# Altium PCB PCB1.PcbDoc
Units mm, origin at the board's own origin, x right, y up, seen from the top; angles counter-clockwise.
Board outline 152.4 x 101.6 mm, 2 copper layers (Top Layer, Bottom Layer); 8 components, 8 nets, 29 pads, 0 vias.
Unrouted connection lines stored in the file: 16.
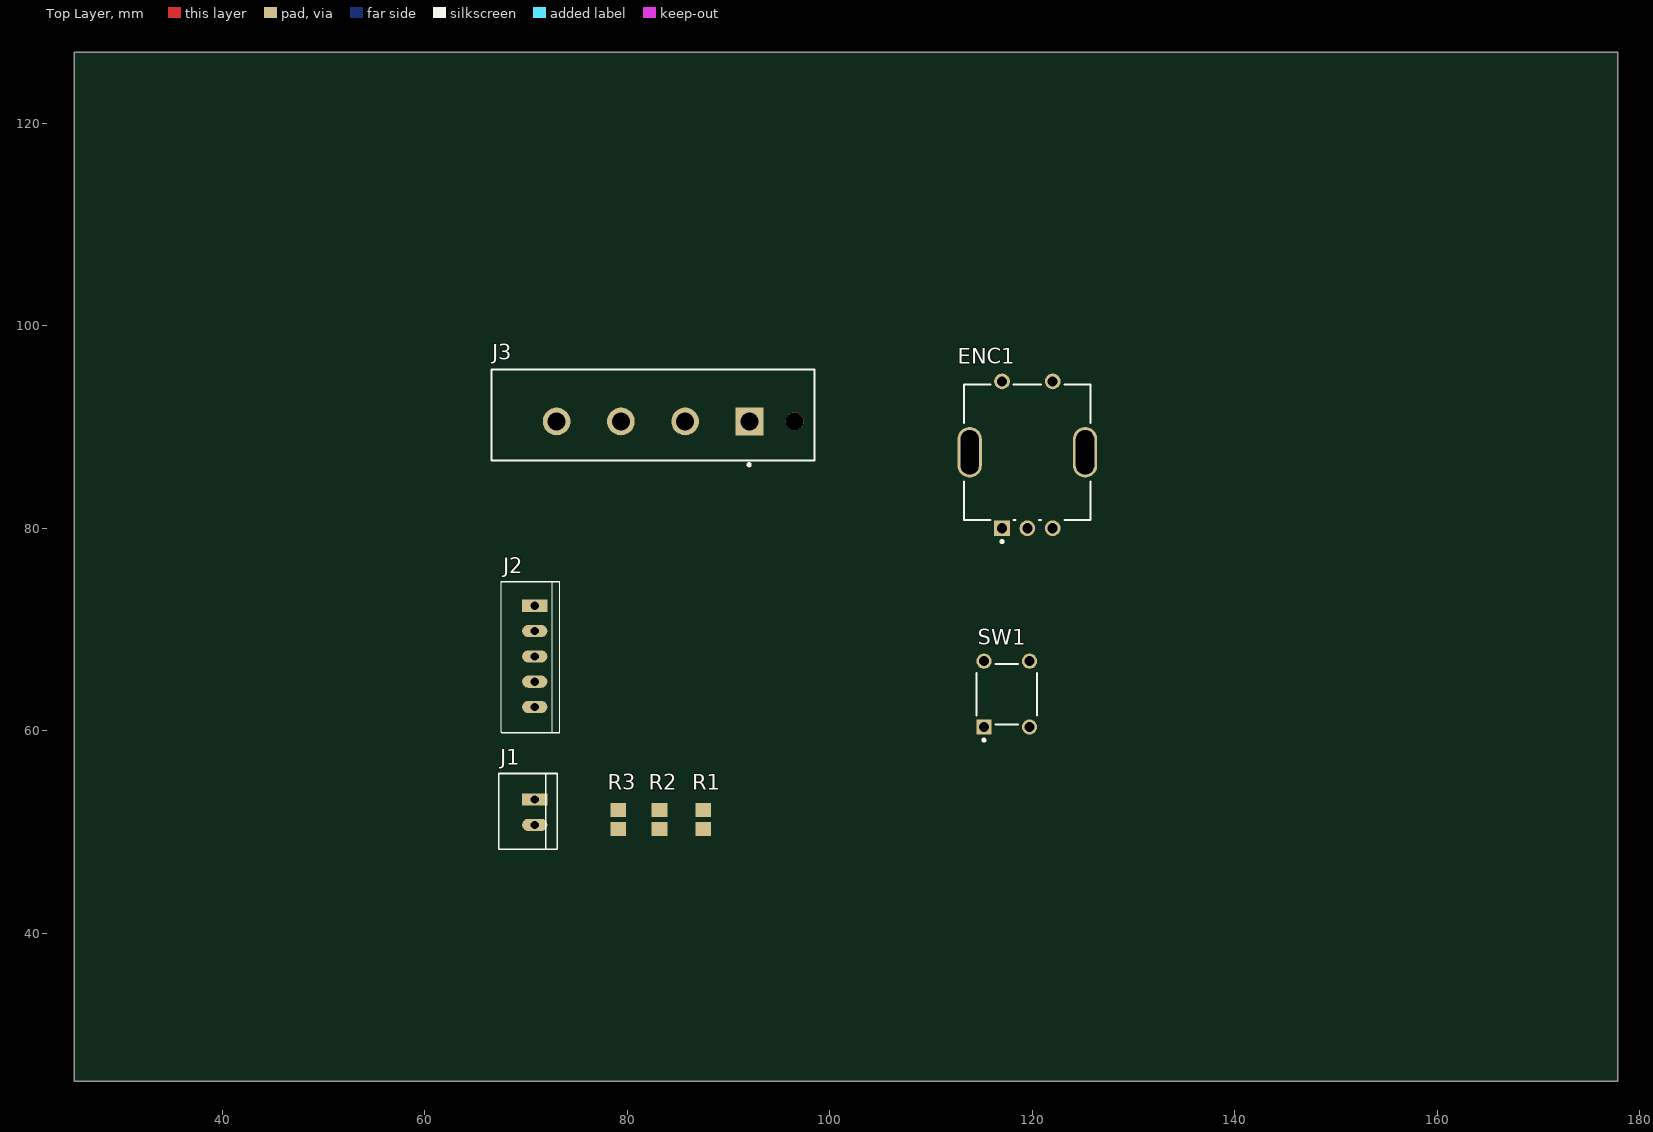
[diagram p0: Top Layer view]
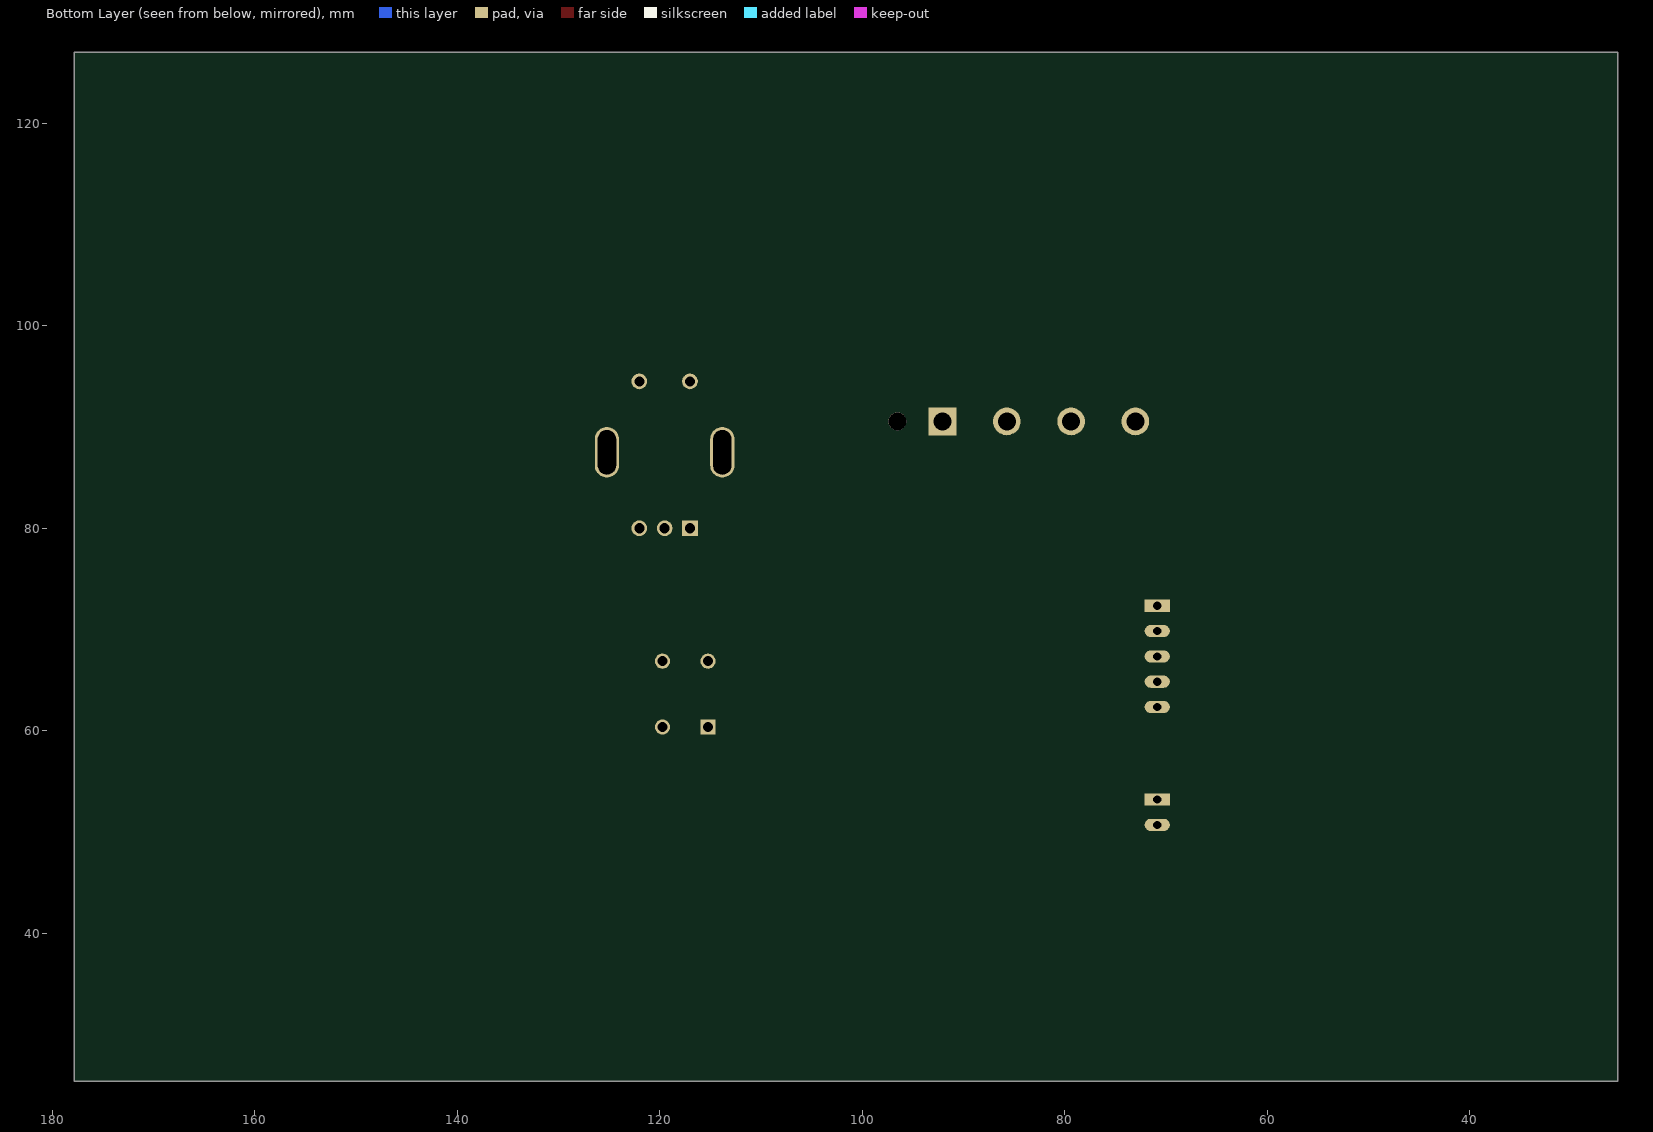
[diagram p1: Bottom Layer view, seen from below]

## Layer stack, top to bottom
Top Solder: solder mask 0.0102, Solder Resist, Dk 3.5
Top Layer: signal copper 0.0356
Dielectric 1: dielectric 0.32, FR-4, Dk 4.8
Bottom Layer: signal copper 0.0356
Bottom Solder: solder mask 0.0102, Solder Resist, Dk 3.5

## Board outline
25.4,25.4 177.8,25.4 177.8,127 25.4,127

## Design rules (kind name [scope] priority, off if disabled: settings)
Clearance [All] p1: gap=0.254 ignorepadtopadclearanceinfootprint=FALSE except(0: Arc-Hole Track-Hole SMDPad-Hole THPad-Hole Via-Hole Fill-Hole Poly-Hole Region-Hole Text-Hole)
PolygonConnect [All] p1: connectstyle=Relief reliefconductorwidth=0.254 reliefentries=4 polygonreliefangle="90 Angle" airgapwidth=0.254
RoutingVias [All] p1: holewidth=0.711 width=1.27 viastyle="Through Hole" minholewidth=0.711 minwidth=1.27 maxholewidth=0.711 maxwidth=1.27
SolderMaskExpansion [All] p1: expansion=0.102 istentingtop=FALSE
Width [All] p1: maxlimit=0.254 minlimit=0.254 preferedwidth=0.254
30 further rules are at their usual default settings.

## Components (designator, comment, footprint, x,y, rotation, side; value= is the part's Value field where it differs from the comment)
ENC1 "PEC11R-4215F-S0024" FP-PEC11R-4215F-S0024-MFG 119.507,87.503 r0 top
J1 "Power" JST_2P 70.866,53.213 r0 top
J2 "JST_5P" JST_5P 70.866,62.35 r0 top
J3 "OLED" FP-643416-1-MFG 82.55,91.186 r180 top
R1 "Res" RESC2013X60X40ML20T25 87.503,51.247 r90 top
R2 "Res" RESC2013X60X40ML20T25 83.185,51.247 r270 top
R3 "Res" RESC2013X60X40ML20T25 79.121,51.247 r270 top
SW1 "1825910-6" TECO-1825910-6_V 117.475,63.627 r90 top

## Footprints (in the part's own frame and the unit in brackets; to place one, negate y for a bottom-side part, rotate by r counter-clockwise, add the part's x,y. Pads: shape width x height; smd on the part's side, far side on the other; paste and mask are expansions set on the pad)
FP-643416-1-MFG [mm]
  rect 2.73x2.73 hole 1.78 paste-1000 mask+0: 1(-9.525,0.635)
  round 2.73 hole 1.78 paste-1000 mask+0: 2(-3.175,0.635) 3(3.175,0.635) 4(9.525,0.635)
  round 1.78 hole 1.78 unplated paste-1000 mask+0: ""(-13.975,0.635)
  silkscreen extent -15.94,-4.51 15.94,5.03, body extent -16.04,-4.61 16.04,4.61, height 0.25
FP-PEC11R-4215F-S0024-MFG [mm]
  round 1.55 hole 1 paste-1000 mask+0: 1(-2.5,7) 2(2.5,7) B(2.5,-7.5) C(0,-7.5)
  rrect100% 2.4x5 hole 4.4 slot 1.8 at 0 deg paste-1000 mask+0: 3(-5.7,0) 4(5.7,0)
  rect 1.55x1.55 hole 1 paste-1000 mask+0: A(-2.5,-7.5)
  silkscreen extent -6.25,-8.95 6.25,6.7, body extent -7,-8.37 7,7.88, height 0.25
JST_2P [mm]
  rect 2.5x1.2 hole 0.8: 1(0,0)
  oval 2.5x1.2 hole 0.8: 2(0,-2.5)
  silkscreen extent -3.57,-4.9 2.22,2.6, body extent -3.5,-4.9 2.25,2.5, height 7.01
JST_5P [mm]
  rect 2.5x1.2 hole 0.8: 1(0,10)
  oval 2.5x1.2 hole 0.8: 2(0,7.5) 3(0,5) 4(0,2.5) 5(0,0)
  silkscreen extent -3.3,-2.58 2.47,12.4, body extent -3.3,-2.47 2.45,12.43, height 6.91
RESC2013X60X40ML20T25 [mm] "Chip Resistor, 2-Leads, Body 2.00x1.25mm, IPC Low Density"
  rect 1.4x1.55 smd: 1(-0.95,0) 2(0.95,0)
  body extent -1.1,-0.72 1.1,0.72, height 0.6
TECO-1825910-6_V [mm] "Switch, 4-Leads, Body 5.99x5.99mm"
  rect 1.5x1.5 hole 0.99: 1(-3.25,2.25)
  round 1.5 hole 0.99: 2(3.25,2.25) 3(-3.25,-2.25) 4(3.25,-2.25)
  silkscreen extent -4.67,-3 3,3, body extent -3,-2.99 2.99,3, height 5

## Part data
ENC1: library part CMP-1747-00012-2, "ROTARY ENCODER MECHANICAL 24PPR", Max Operating Temperature=70°C, Min Operating Temperature=-30°C, Package Quantity=150, Built in Switch=Yes, Detent=Yes, Encoder Type=Mechanical, Height=13.4mm, Hole Diameter=1.8mm, Length=21.5mm, Mount="Through Hole", Number of Channels=2, Orientation=Vertical, Output Type=Quadrature, Packaging=Bulk, Pulses per Revolution=24, Radiation Hardening=No, REACH SVHC="No SVHC", RoHS Compliant=Yes, Series=PEC11R, Termination="PC Pins", Type=Mechanical, Width=12.5mm
J1: library part JST_2P
J3: library part CMP-03369-000025-1, "CONN HDR 4POS 0.25 TIN PCB", Current Rating=12A, Manufacturer=TE, Manufacturer Part Number=643416-1, Temperature="-40°C to +105°C", Temperature Range High=+105°C, Temperature Range Low=-40°C, Voltage Rating=600V, Automotive=No, Category=Conn, ComponentLink2Description=Datasheet, ComponentLink2URL=https://www.te.com/usa-en/product-643416-1.html?te_bu=Cor&te_type=other&te_campaign=oct_glo_cor-oct-global-oth-prtnr-fy19-oct-octo-buy-bom_sma-298_2&elqCampaignId=35216, Conn Gender=Female, Conn Orientation=Vertical, Contact Material=Tin, Device Class L1=Connectors, Device Class L2="Headers and Wire Housings", Device Class L3=unset, Digikey Description="CONN HDR 4POS 0.25 TIN PCB", Height=14.99mm, Is Female=yes, Lead Free=Yes, Mouser Description="Conn Power SKT 4 POS 6.35mm Solder ST Thru-Hole 4 Terminal 1 Port Bag", Number Of Contacts=4, Number Of Rows=1, Octopart=https://octopart.com/643416-1-te+connectivity-39538283, Package=643416-1, Pitch=6.35mm, RoHS=TRUE, Standoff Height=0.63mm
R1 R2 R3: library part CMP-2001-00629-1, Manufacturer=Panasonic, Part Number=ERA6AEB332V
SW1: library part CMP-1684-00021-1, "Tact Switch, SPST-NO, 0.05 A, -35 to 85 degC, 4-Pin THD, RoHS, Bulk", Actuator Color=Black, Contact Rating @ Voltage=0.05A@24VDC, Dielectric Strength=500VAC, Manufacturer="TE Connectivity", Maximum AC Voltage Rating=N/A, Maximum Contact Resistance=100mOhm, Maximum DC Voltage Rating=24V, Minimum Insulation Resistance=100MOhm, Operating Temperature=-35to85C, Package Description="4-Pin Through Hole Device, Body 5.99 x 5.99 mm, Pitch 6.5 mm", Package Reference=THD, Actuator Length=1.4mm, Actuator Material=PolybutyleneTerephthalate, Actuator Style=RoundButton, Base Material=N/A, Body Orientation=Straight, Bushing Type=Unthreaded, Contact Material=CopperAlloy, Contact Plating=Silver, Datasheet URL=http://www.te.com/commerce/DocumentDelivery/DDEController?Action=showdoc&DocId=Customer+Drawing%7F1825910%7FC9%7Fpdf%7FEnglish%7FENG_CD_1825910_C9.pdf%7F1825910-6, Datasheet Version="Rev. C9", Dimension=5.99x5mm, Electrical Life=100000Cycles, Family=1825910, Function=MomentaryContact, Housing Material=N/A, Illumination=N/R, Manufacturer URL=http://www.te.com, Mechanical Life=100000Cycles, Mounting=ThroughHole, Packaging=N/A, Part No=1825910-6, Pole Throw Configuration=SPST, Product Weight=N/A, RoHS=Yes, Seal Description=N/A, Seal Location=N/A, Switch Configuration=OFF(ON), Terminal Type=PCPins, Thread Size=N/R

## Nets (pads, with @x,y where several pads share a name; then routed paths per layer and width w, separated by ;. In a path a pad name is that pad's centre, name@x,y a point inside that pad or via, vN(x,y) a via of type N, cw(c..) or ccw(c..) an arc to the next point about the centre after c; other vN are vias at no path point)
+5V: J1.2 J3.2 R1.1 R2.2 R3.2
CLK: ENC1.A J2.1 R2.1
DT: ENC1.B J2.2 R3.1
GND: ENC1.2 ENC1.C J1.1 J3.1 SW1.4
PB: R1.2 SW1.1
SCK: J2.3 J3.3
SDA: J2.4 J3.4
SW: ENC1.1 J2.5
pads on no net: ENC1.3 ENC1.4 J3. SW1.2 SW1.3